# Altium PCB 20250717-Copy of PowerUpDelay-SCR.PcbDoc
Units mm, origin at the board's own origin, x right, y up, seen from the top; angles counter-clockwise.
Board outline 52 x 90 mm, 2 copper layers (Top Layer, Bottom Layer), stack 1.569 mm thick; 57 components, 36 nets, 143 pads, 166 vias.
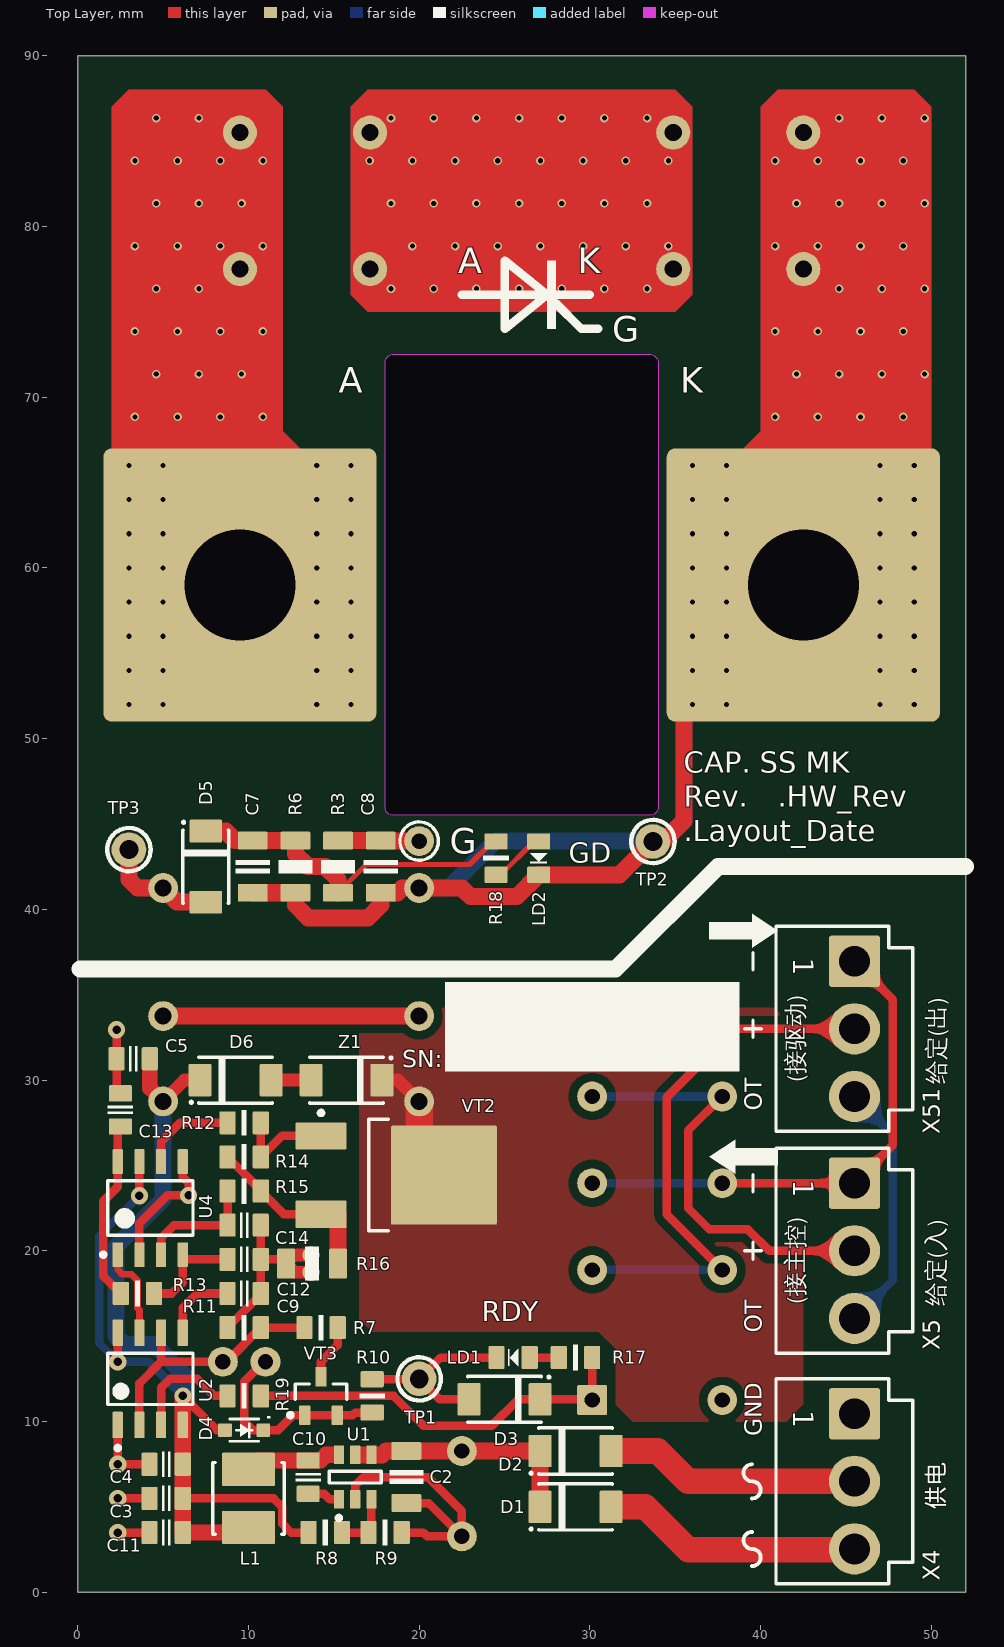
[diagram p0: Top Layer view]
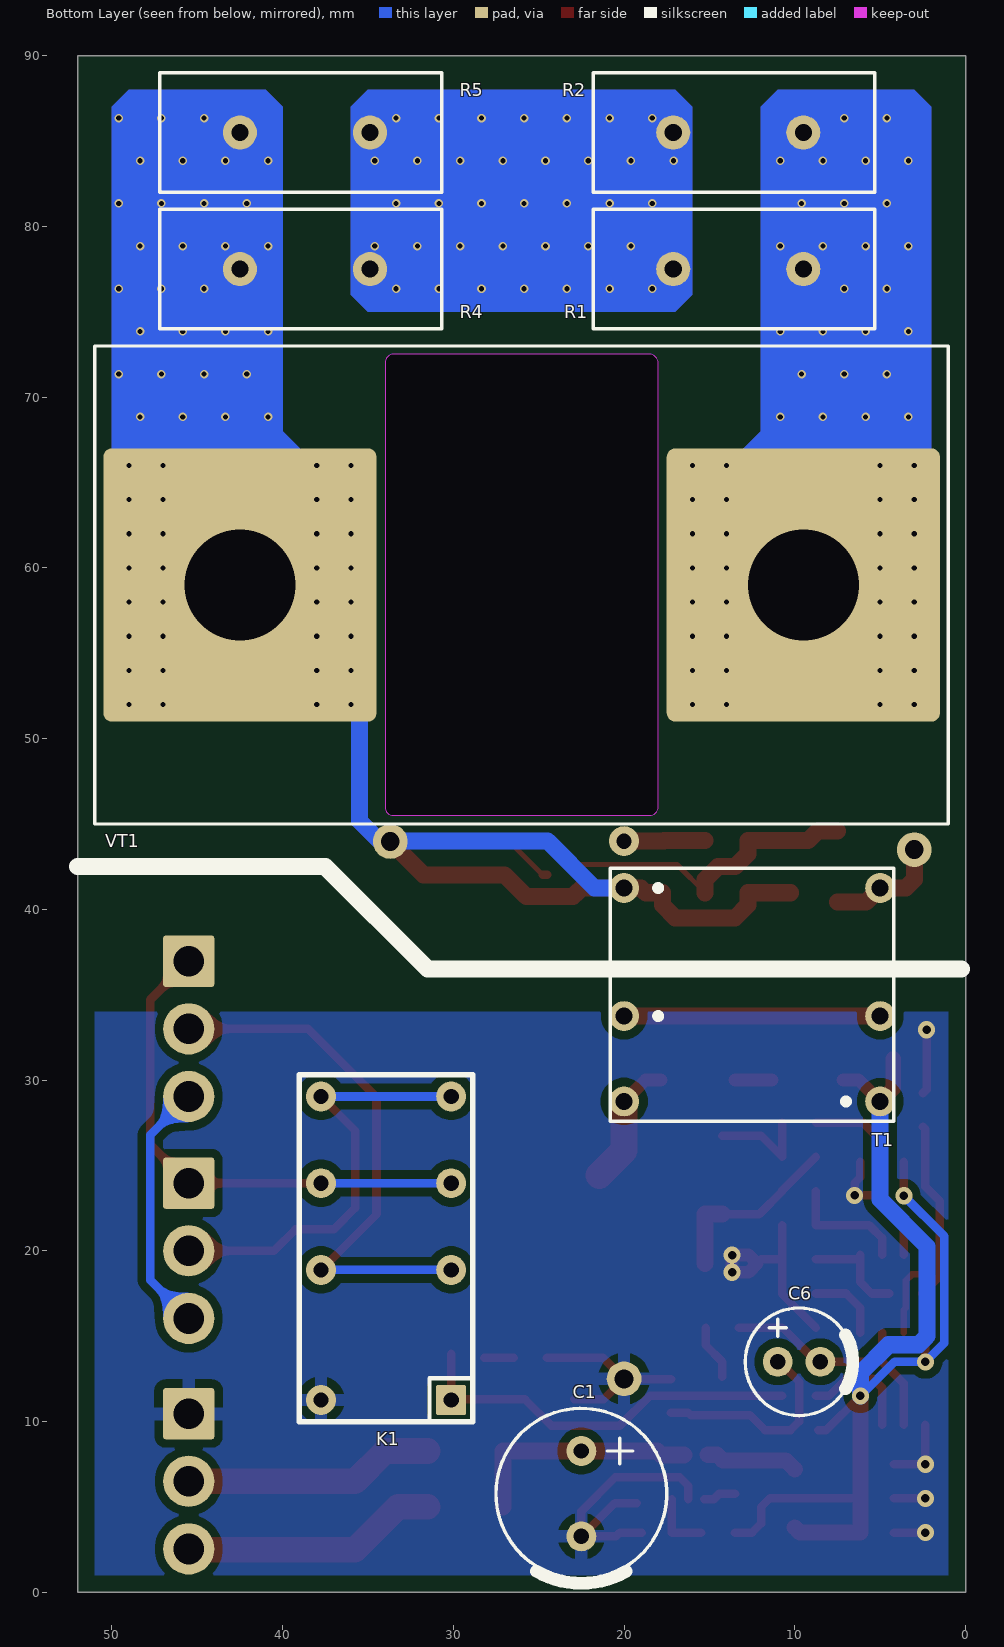
[diagram p1: Bottom Layer view, seen from below]

## Layer stack, top to bottom
Top Solder: solder mask 0.0254, SM-001, Dk 4
Top Layer: signal copper 0.035
Dielectric 1: core 1.4986, Core-043, Dk 4.3
Bottom Layer: signal copper 0.035
Bottom Solder: solder mask 0.0254, SM-001, Dk 4

## Board outline
0,0 0,90 52,90 52,0
cut-out: 18.5,45.5 18.401,45.5 18.217,45.576 18.076,45.717 18,45.901 18,46 18,72 18,72.099 18.076,72.283 18.217,72.424 18.401,72.5 18.5,72.5 33.5,72.5 33.599,72.5 33.783,72.424 33.924,72.283 34,72.099 34,72 34,46 34,45.901 33.924,45.717 33.783,45.576 33.599,45.5 33.5,45.5

## Design rules (kind name [scope] priority, off if disabled: settings)
BoardOutlineClearance [All] p1: gap=1 ignorepadtopadclearanceinfootprint=FALSE except(0: Arc-SplitContinuation Track-SplitContinuation SMDPad-SplitContinuation THPad-SplitContinuation Via-SplitContinuation Fill-SplitContinuation Poly-SplitContinuation Region-SplitContinuation Text-SplitContinuation)
Clearance Clearance_1 [InPolygon] p1: gap=0.5 ignorepadtopadclearanceinfootprint=FALSE
Clearance [All] p2: gap=0.25 ignorepadtopadclearanceinfootprint=FALSE
ComponentClearance [All] p1 off: gap=0.254 collisioncheckmode=3 verticalgap=0.25 showdistances=FALSE
PolygonConnect PolygonConnect_1 [IsNamedPolygon('NetT1_3_L-01_P-001')] p1: connectstyle=Direct reliefconductorwidth=0.254 reliefentries=4 polygonreliefangle="90 Angle" airgapwidth=0.254
PolygonConnect [All] p2: thpad.connectstyle=Relief thpad.reliefconductorwidth=0.75 thpad.reliefentries=4 thpad.polygonreliefangle="90 Angle" thpad.airgapwidth=0.5 smdpad.connectstyle=NoConnect smdpad.reliefconductorwidth=0.254 smdpad.reliefentries=4 smdpad.polygonreliefangle="90 Angle" smdpad.airgapwidth=0.254 via.connectstyle=Direct via.reliefconductorwidth=0.254 via.reliefentries=4 via.polygonreliefangle="90 Angle" via.airgapwidth=0.254
RoutingVias [All] p1: holewidth=0.4 width=0.75 viastyle="Through Hole" minholewidth=0.3 minwidth=0.5 maxholewidth=1 maxwidth=2
SolderMaskExpansion [All] p1: expansion=0.102 istentingtop=FALSE
SupplyNets "Schematic Supply Nets_3" [InNet('GND')] p1: voltage=0.000
SupplyNets "Schematic Supply Nets_2" [InNet('GND-S')] p2: voltage=0.000
SupplyNets "Schematic Supply Nets_1" [InNet('Vc')] p3: voltage=0.000
SupplyNets "Schematic Supply Nets" [InNet('+12')] p4: voltage=0.000
Width [All] p1: maxlimit=2.5 minlimit=0.25 preferedwidth=0.25
29 further rules are at their usual default settings.

## Components (designator, comment, footprint, x,y, rotation, side; value= is the part's Value field where it differs from the comment)
C1 "470uF/35V" RB5M/D10 22.5,5.775 r270 bottom
C2 "2u2" CAPC1206N 19.25,6.75 r270 top
C3 "10uF" CAPC0805N 5.18,5.5 r180 top
C4 "100n" CAPC0805N 5.18,7.5 r0 top
C5 "1u" CAPC0805N 3.25,31.25 r180 top
C6 "47uF/50V" RB2.5M/D6.3 9.75,13.5 r180 bottom
C7 "10u" CAPC1206N 10.25,42.5 r270 top
C8 "100n" CAPC1206N 17.75,42.5 r270 top
C9 "10n" CAPC0805N 9.75,17.5 r0 top
C10 "100nF" CAPC0805N 13.5,6.75 r90 top
C11 "10uF" CAPC0805N 5.18,3.5 r180 top
C12 "1n" CAPC0805N 9.75,19.5 r180 top
C13 "1u" CAPC0805N 2.5,28.25 r90 top
C14 "100p" CAPC0805N 9.75,21.5 r0 top
D1 "M4F" SMAF 29.16,5 r0 top
D2 "M4F" SMAF 29.16,8.275 r0 top
D3 "M4F" SMAF 25,11.3 r180 top
D4 "1N4148WS" SOD-323F-1K2A 9.75,9.5 r0 top
D5 "US1MF" SMAF 7.5,42.5 r270 top
D6 "US1MF" SMAF 9.25,30 r0 top
K1 "HFD27-12M" RLY-DPDT 37.75,11.26 r180 bottom
L1 "10uH" INDP4040X20N 10,5.5 r270 top
LD1 "GRN/0805" LEDC0805N 25.5,13.75 r180 top
LD2 "GRN/0805" LEDC0805N 27,43 r270 top
R1 "XK-D17-100R" PTC-X17 13.31,77.5 r180 bottom
R2 "XK-D17-100R" PTC-X17 13.31,85.5 r180 bottom
R3 "10R" RESC1206N 15.25,42.5 r90 top
R4 "XK-D17-100R" PTC-X17 38.69,77.5 r180 bottom
R5 "XK-D17-100R" PTC-X17 38.69,85.5 r180 bottom
R6 "1K" RESC1206N 12.75,42.5 r270 top
R7 "100R" RESC0805N 14.25,15.5 r180 top
R8 "243K" RESC0805N 14.5,3.5 r180 top
R9 "22K1" RESC0805N 18,3.5 r180 top
R10 "5K1" RESC0805N 17.25,11.5 r270 top
R11 "100K" RESC0805N 9.75,15.5 r180 top
R12 "30R" RESC0805N 9.75,27.5 r180 top
R13 "8K2" RESC0805N 3.5,17.5 r0 top
R14 "10K" RESC0805N 9.75,25.5 r180 top
R15 "1K" RESC0805N 9.75,23.5 r0 top
R16 "1R" RESC1206N 13.725,19.25 r180 top
R17 "10K" RESC0805N 29.155,13.75 r180 top
R18 "5K1" RESC0805N 24.5,43 r270 top
R19 "10R" RESC0805N 9.75,11.5 r180 top
T1 "DRT801-111" TRANS-DRT801-1+1+1 12.5,35 r270 bottom locked
TP1 "TESTPOINT" TESTPOINT 20,12.5 r0 top
TP2 "TESTPOINT" TESTPOINT 33.691,43.975 r0 top
TP3 "TESTPOINT" TESTPOINT 3,43.5 r0 top
U1 "LMR50410YQDBVRQ1" FP-DBV0006A-MFG 16.25,6.75 r90 top
U2 "NE555DR" FP-D0008A-MFG 4.25,12.5 r90 top
U4 "UC2845AD8TR" D0008A_N 4.25,22.5 r90 top
VT1 "MT200A-16.71" MT200A-16.71 26,59 r0 bottom
VT2 "IRFR024N" ONSC-DPAK-3-369AA-01_V 18.65,24.435 r0 top
VT3 "BC807-40" SOT-23_N 14.25,11.5 r90 top
X4 "JST-B3P-VH" B3P-VH 45.5,6.5 r270 top
X5 "JST-B3P-VH" B3P-VH 45.5,20 r270 top
X51 "JST-B3P-VH" B3P-VH 45.5,33 r270 top
Z1 "1SMAF4742A" SMAF 15.75,30 r180 top

## Footprints (in the part's own frame and the unit in brackets; to place one, negate y for a bottom-side part, rotate by r counter-clockwise, add the part's x,y. Pads: shape width x height; smd on the part's side, far side on the other; paste and mask are expansions set on the pad)
B3P-VH [mm] "JST-B3P-V, 3.96mm间距接插件"
  rrect10% 3x3 hole 1.8: 1(-3.96,0)
  round 3 hole 1.8: 2(0,0) 3(3.96,0)
  silkscreen extent -6,-4.6 6,3.4, body extent -5.91,-4.85 5.91,3.65, height 11
CAPC0805N [mm] "Chip Capacitor, 2-Leads, Body 2.00x1.25mm, IPC Medium Density"
  rrect15% 0.95x1.35 smd: 1(-0.975,0) 2(0.975,0)
  silkscreen extent -0.25,-0.75 0.25,0.75, body extent -1,-0.62 1,0.63, height 0.78
CAPC1206N [mm] "Chip Capacitor, 2-Leads, Body 3.20x1.65mm, IPC Medium Density"
  rrect15% 1.05x1.75 smd: 1(-1.525,0) 2(1.525,0)
  silkscreen extent -0.4,-1 0.4,1, body extent -1.6,-0.8 1.6,0.8, height 1
D0008A_N [mm] "SOIC, 8-Leads, Body 5x4mm, Pitch 1.27mm, IPC Medium Density"
  rrect17% 1.45x0.6 smd: 1(-2.725,1.905) 2(-2.725,0.635) 3(-2.725,-0.635) 4(-2.725,-1.905) 5(2.725,-1.905) 6(2.725,-0.635) 7(2.725,0.635) 8(2.725,1.905)
  silkscreen extent -2.85,-2.5 1.6,2.88, body extent -3,-2.45 3,2.45, height 1.63
FP-D0008A-MFG [mm]
  rrect17% 1.55x0.6 smd paste+0 mask+0: 1(-2.7,1.905) 2(-2.7,0.635) 3(-2.7,-0.635) 4(-2.7,-1.905) 5(2.7,-1.905) 6(2.7,-0.635) 7(2.7,0.635) 8(2.7,1.905)
  silkscreen extent -4.17,-2.5 1.5,2.5, body extent -3.57,-2.75 3.57,2.75, height 0.25
FP-DBV0006A-MFG [mm]
  rrect17% 1.1x0.6 smd paste+0 mask+0: 1(-1.3,0.95) 2(-1.3,0) 3(-1.3,-0.95) 4(1.3,-0.95) 5(1.3,0) 6(1.3,0.95)
  silkscreen extent -2.52,-1.53 0.35,1.53, body extent -1.95,-1.78 1.95,1.78, height 0.25
INDP4040X20N [mm] "Precision Wire Wound Inductor, 2-Leads, Body 4.00x4.00mm, IPC Medium Density"
  rrect7% 1.95x3.1 smd: 1(-1.7,0) 2(1.7,0)
  silkscreen extent -2.1,-2.1 2.1,2.1, body extent -2.1,-2.1 2.1,2.1, height 2
LEDC0805N [mm]
  rrect15% 0.95x1.35 smd: 1(-0.975,0) 2(0.975,0)
  silkscreen extent -0.3,-0.5 0.3,0.5, body extent -1.05,-0.67 1.05,0.68, height 0.9
MT200A-16.71 [mm] "拓直可控硅模块，200A，1600V,"
  rrect6% 16x16 hole 6.5: 1(-16.5,0) 2(16.5,0)
  round 1.75 hole 0.9: 3(-6,15)
  silkscreen extent -25,-14 25,14
ONSC-DPAK-3-369AA-01_V [mm] "DPAK, 3-Leads, Body 6.54x6.095mm, Pitch 2.29mm"
  rrect10% 3x1.6 smd: 1(-4.4,2.29) 3(-4.4,-2.29)
  rrect3% 6.2x5.8 smd: 4(2.8,0)
  silkscreen extent -4.52,-3.27 -0.45,3.76, body extent -4.82,-3.29 4.88,3.29, height 2.35
PTC-X17 [mm] "PTC, Thru-Hole, Dipped Radial; Body D17 x 7 mm (WxT) Pin Spacing 7.62 mm (typ)"
  round 2 hole 1: 1(-3.81,0) 2(3.81,0)
  silkscreen extent -8.5,-3.5 8,3.5
RB2.5M/D6.3 [mm]
  round 1.75 hole 0.9: 1(-1.25,0) 2(1.25,0)
  silkscreen extent -3.15,-3.15 3.15,3.15, body extent -3.15,-3.15 3.15,3.14, height 6.3
RB5M/D10 [mm]
  round 1.75 hole 0.9: 1(-2.5,0) 2(2.5,0)
  silkscreen extent -5,-5 5.25,5, body extent -5,-5 5,5, height 10
RESC0805N [mm] "Chip Resistor, 2-Leads, Body 2.00x1.25mm, IPC Medium Density"
  rrect15% 0.95x1.35 smd: 1(-0.975,0) 2(0.975,0)
  silkscreen extent -0.15,-0.75 0.15,0.75, body extent -1,-0.63 1,0.62, height 0.6
RESC1206N [mm] "Chip Resistor, 2-Leads, Body 3.20x1.65mm, IPC Medium Density"
  rrect15% 1.05x1.75 smd: 1(-1.525,0) 2(1.525,0)
  silkscreen extent -0.4,-1 0.4,1, body extent -1.6,-0.8 1.6,0.8, height 0.6
RLY-DPDT [mm]
  round 1.75 hole 0.9: COL1(0,0) COM1(0,7.62) COM2(7.62,7.62) NC1(0,12.7) NC2(7.62,12.7) NO1(0,17.78) NO2(7.62,17.78)
  rrect10% 1.75x1.75 hole 0.9: COL2(7.62,0)
  silkscreen extent -1.27,-1.27 8.89,19.05
SMAF [mm] "Flat SMA Package"
  rrect10% 1.34x1.9 smd paste+0 mask+0: 1(-2.08,0) 2(2.08,0)
  silkscreen extent -2.65,-1.35 2.15,1.35, body extent -2.85,-1.45 2.85,1.45, height 0.25
SOD-323F-1K2A [mm] "SOD-323F/SC-90; 2 Leads; Body 1.7 x 1.3 mm, (LxW)"
  rrect15% 0.8x0.8 smd: 1(1.125,0) 2(-1.125,0)
  silkscreen extent -0.85,-0.65 1.55,0.83, body extent -1.25,-0.63 1.25,0.63, height 0.78
SOT-23_N [mm] "SOT23, 3-Leads, Body 2.9x1.3mm, Pitch 0.95mm, Lead Span 2.5mm, IPC Medium Density"
  rrect15% 1.15x0.65 smd: 1(-1.125,0.95) 2(-1.125,-0.95) 3(1.125,0)
  silkscreen extent -1.25,-1.5 0.7,1.92, body extent -1.4,-1.45 1.4,1.45, height 1.3
TESTPOINT [mil]
  round 80 hole 43.31: 1(0,0)
  silkscreen extent -50,-50 50,50
TRANS-DRT801-1+1+1 [mm] "IGBT驱动变压器 DRT801/111B, 兵字"
  round 1.75 hole 1: 1(-6.25,-7.5) 2(1.25,-7.5) 3(6.25,-7.5) 4(6.25,7.5) 5(1.25,7.5) 6(-6.25,7.5)
  silkscreen extent -7.4,-8.3 7.4,8.3, body extent -7.4,-8.3 7.4,8.3, height 13.5

## Part data
C1 C6: library part "CAPACITOR POL(S)"
C2 C3 C4 C5 C7 C8 C9 C10 C11 C12 C13 C14: library part CAPACITOR(S)
D1 D2 D3 D4 D5 D6: library part DIODE(S), "二极管"
K1: library part RELAY-DPDT, "继电器"
L1: library part IND
LD1 LD2: library part LED(S)
R1 R2 R4 R5: library part "RESISTOR(S) NL", "None Liner Resistor"
R3 R6 R11 R12 R13 R14 R15 R16 R17 R18 R19: library part RESISTOR(S)
R7 R8 R9 R10: library part RESISTOR(S), "电阻"
T1: library part TRANSFORM-DRT801-111_FB, "IGBT驱动变压器, DRT801/111, 12.5x16.6mm"
TP1 TP2 TP3: "测试点"
U1: library part CMP-04918-000478-1, "NIXON PLUS-LMR50410YQDBVRQ1"
U2: library part CMP-1685-00007-2, "IC OSC SGL TIMER 100KHZ 8-SOIC"
U4: library part CMP-0319-00631-2, "PWM Controller with Current Control, 50 % Duty Cycle, -40 to +85 degC, 8-pin SOIC (D), Green (RoHS & no Sb/Br)"
VT1: library part SCR(S), "晶闸管"
VT2: library part "MOSFET - N-CH", "MOSFET N-CH D-PAK/TO252"
VT3: library part PNP, "PNP Bipolar Transistor"
X4 X5 X51: library part 3PIN-PCB-Connector, "线路板接插件"
Z1: library part "DIODE ZENER(S)", "齐纳二极管"

## Via types
v1: diameter 0.5, hole 0.3, Top Layer to Bottom Layer, tented both sides, 156 vias
v2: diameter 1, hole 0.5, Top Layer to Bottom Layer, tented both sides, 10 vias

## Nets (pads, with @x,y where several pads share a name; then routed paths per layer and width w, separated by ;. In a path a pad name is that pad's centre, name@x,y a point inside that pad or via, vN(x,y) a via of type N, cw(c..) or ccw(c..) an arc to the next point about the centre after c; other vN are vias at no path point)
+12: C3.1 C4.2 C5.1 C11.1 D4.2 D6.1 L1.2 R8.2 T1.4 U2.4 U2.8 U4.7 | length 70.1
  Top Layer w0.5: v2(2.345,13.5) U2.8 ; v2(3.615,23.225) U4.7 ; C3.1 11.475,5.5 11.975,5 11.975,4.025 12.5,3.5 R8.2 ; v2(6.155,11.5) 8.155,9.5 D4.2
  Top Layer w0.75: T1.4 6.25,30 D6.1
  Top Layer w0.9: C5.1 4.225,29.525 T1.4
  Top Layer w0.95: v2(6.155,11.5) U2.4 C4.2 C3.1 C11.1 9.7,3.5 L1.2
  Bottom Layer w0.5: v2(3.615,23.225) 1.25,20.86 1.25,14.595 v2(2.345,13.5) 4.155,13.5 v2(6.155,11.5)
  Bottom Layer w1: T1.4 5,23 2.25,20.25 2.25,15 2.75,14.5 4.5,14.5 6.155,12.845 v2(6.155,11.5)
GND: C1.2 C2.2 C3.2 C4.1 C5.2 C9.2 C11.2 C12.1 C13.2 C14.2 D3.2 K1.COL1 LD1.2 R9.1 R10.1 R11.2 R16.2 TP1.1 U1.2 U2.1 U4.2 U4.5 X4.1 | length 60.5
  Top Layer w0.5: v2(2.275,32.95) C5.2 2.275,29.45 C13.2 ; v2(2.345,3.5) C11.2 ; v2(2.345,5.5) C3.2 ; U2.1 v2(2.345,7.5) C4.1 ; U4.2 3.615,21.615 5.25,23.25 v2(6.5,23.25) ; U4.5 6.155,24.318 6.5,23.973 v2(6.5,23.25) ; v2@6.525,23.225 v2(6.5,23.25) ; R11.2 10.725,17.45 C9.2 C12.1 ; C14.2 C12.1 ; R16.2 11.95,19.5 C12.1 ; U1.2 16.25,6.25 16.75,6.75 20.5,6.75 22.5,4.75 C1.2 ; R10.1 19.975,12.475 TP1.1 ; R9.1 20.25,3.5 20.475,3.275 C1.2 ; C2.2 20.55,5.225 C1.2 ; D3.2 21.2,11.3 TP1.1 ; LD1.2 21.25,13.75 TP1.1
  Top Layer w0.75: v2@13.669,18.75 12.7,18.75 R16.2 12.7,19.75 v2@13.669,19.75 ; v2(13.675,18.744) v2(13.675,19.744)
  Top Layer w1: X4.1@45.46,10.5 X4.1
GND-S: K1.NC1 K1.NC2 X5.1 X51.1 | length 30.3
  Top Layer w0.5: K1.NC1 X5.1 47.75,26.21 47.75,34.71 X51.1
  Bottom Layer w0.5: K1.NC2 37.71,23.96 K1.NC1@37.75,24
Iref: K1.NO1 K1.NO2 X5.2 | length 25.8
  Top Layer w0.5: K1.NO1 35.75,27.04 35.75,22.5 37,21.25 39.25,21.25 40.5,20 X5.2
  Bottom Layer w0.5: K1.NO2 K1.NO1
Iref-s: K1.COM1 K1.COM2 X51.2 | length 31.7
  Top Layer w0.5: K1.COM1 34.5,22.13 34.5,29 38.5,33 X51.2
  Bottom Layer w0.5: K1.COM2 K1.COM1
NetC1_1: C1.1 C2.1 D1.1 D2.1 U1.4 U1.5 | length 13.9
  Top Layer w1: U1.5@16.5,8.05 U1.4 17.83,8.05 18.055,8.275 C2.1 C1.1 D2.1 D1.1
NetC6_1: C6.1 D4.1 R10.2 VT3.1 VT3.2 | length 12.2
  Top Layer w0.5: C6.1 10.91,13.5 9.75,12.34 9.75,12.25 9.75,10 10.25,9.5 D4.1 11.75,9.5 12.625,10.375 VT3.1 VT3.2 16.1,10.375 16.25,10.525 R10.2
NetC6_2: C6.2 R7.2 R11.1 U2.2 U2.6 | length 15.1
  Top Layer w0.5: U2.2 3.615,12.23 4.885,13.5 ; U2.6 4.885,13.5 ; R7.2 R11.1 8.725,13.5 C6.2 4.885,13.5
NetC7_1: C7.1 D5.1 R3.1 R6.1 R18.1 | length 20.6
  Top Layer w0.3: R3.1 16.9,42.625 22.955,42.625 24.305,43.975 R18.1
  Top Layer w1: D5.1 8.67,44.58 9.225,44.025 C7.1 R6.1 12.75,43.25 13.5,42.5 14.5,42.5 15.25,41.75 R3.1
NetC7_2: C7.2 C8.2 LD2.2 R4.1 R5.1 R6.2 T1.1 TP2.1 VT1.2 | length 85.9
  Top Layer w0.3: 21.725,41.25 22,40.975 22.775,40.975 25.741,40.975 26.791,42.025 LD2.2
  Top Layer w1: C7.2 R6.2 12.75,40.25 13.5,39.5 17,39.5 17.75,40.25 C8.2 18.725,40.975 19,41.25 T1.1 21.725,41.25 22.5,41.25 22.775,40.975 23,40.75 25.725,40.75 LD2.2 31.741,42.025 TP2.1 33.975,43.975 34,44 34.121,44 34.328,44 35.5,45.172 35.5,52 VT1.2
  Bottom Layer w1: T1.1 21.725,41.25 24.475,44 34.121,44 34.328,44 35.5,45.172 35.5,45.379 35.5,52 VT1.2
  other v1: 36,52 38,52 47,52 49,52 36,54 38,54 47,54 49,54 36,56 38,56 47,56 49,56 36,58 38,58 47,58 49,58 36,60 38,60 47,60 49,60 36,62 38,62 47,62 49,62 36,64 38,64 47,64 49,64 36,66 38,66 47,66 49,66 40.85,68.85 43.35,68.85 45.85,68.85 48.35,68.85 42.1,71.35 44.6,71.35 47.1,71.35 49.6,71.35 40.85,73.85 43.35,73.85 45.85,73.85 48.35,73.85 44.6,76.35 47.1,76.35 49.6,76.35 40.85,78.85 43.35,78.85 45.85,78.85 48.35,78.85 42.1,81.35 44.6,81.35 47.1,81.35 49.6,81.35 40.85,83.85 43.35,83.85 45.85,83.85 48.35,83.85 44.6,86.35 47.1,86.35 49.6,86.35
NetC8_1: C8.1 R3.2 VT1.3 | length 4.8
  Top Layer w1: R3.2 17.647,44.025 17.672,44 VT1.3
NetC9_1: C9.1 U2.5 | length 4.4
  Top Layer w0.5: U2.5 6.155,16.655 7,17.5 C9.1
NetC10_1: C10.1 U1.1 | length 1.9
  Top Layer w0.5: C10.1 14.425,5.775 14.75,5.45 U1.1
NetC10_2: C10.2 L1.1 U1.6 | length 5.5
  Top Layer w0.95: L1.1 10.525,7.725 C10.2 14.225,7.725 14.55,8.05 U1.6@15.1,8.05
NetC12_2: C12.2 R13.2 U4.4 | length 6.2
  Top Layer w0.5: R13.2 5.5,17.5 6.155,18.155 U4.4@6.155,19.5 ; U4.4 U4.4@6.155,19.5 ; C12.2 U4.4@6.155,19.5
NetC13_1: C13.1 R13.1 U4.8 | length 10.6
  Top Layer w0.5: C13.1 2.345,27.12 U4.8 2.345,23.75 1.5,22.905 1.5,18.525 R13.1
NetC14_1: C14.1 R15.1 U4.3 | length 7.2
  Top Layer w0.5: U4.3 4.885,20.75 5.635,21.5 C14.1 R15.1
NetD1_2: D1.2 X4.3 | length 15.1
  Top Layer w1: X4.3@45.46,2.5 X4.3
  Top Layer w1.5: D1.2@31.5,5 33.25,5 35.75,2.5 X4.3@45.46,2.5
NetD2_2: D2.2 X4.2 | length 14.7
  Top Layer w1.5: D2.2@31.5,8.275 33.975,8.275 35.75,6.5 X4.2
NetD3_1: D3.1 K1.COL2 R17.1 R19.1 | length 23.4
  Top Layer w0.5: R19.1 18.5,11.5 20.25,9.75 24.25,9.75 25.8,11.3 D3.1 30.13,11.3 R17.1 R17.1@30.13,13.967
NetD5_2: D5.2 T1.6 TP3.1 | length 6.8
  Top Layer w1: TP3.1 3,41.75 3.5,41.25 T1.6 5.83,40.42 D5.2
NetD6_2: D6.2 Z1.2 | length 2.2
  Top Layer w0.75: D6.2 Z1.2@13.5,30
NetLD1_1: LD1.1 R17.2 | length 1.7
  Top Layer w0.5: LD1.1 R17.2
NetLD2_1: LD2.1 R18.2 | length 3.3
  Top Layer w0.3: R18.2@24.775,42.025 LD2.1@26.725,43.975
  Top Layer w0.5: R18.2 R18.2@24.775,42.025 ; LD2.1@26.725,43.975 LD2.1
NetR1_1: R1.1 R2.1 R4.2 R5.2
  other v1: 18.35,76.35 20.85,76.35 23.35,76.35 25.85,76.35 28.35,76.35 30.85,76.35 33.35,76.35 19.6,78.85 22.1,78.85 24.6,78.85 27.1,78.85 29.6,78.85 32.1,78.85 34.6,78.85 18.35,81.35 20.85,81.35 23.35,81.35 25.85,81.35 28.35,81.35 30.85,81.35 33.35,81.35 17.1,83.85 19.6,83.85 22.1,83.85 24.6,83.85 27.1,83.85 29.6,83.85 32.1,83.85 34.6,83.85 18.35,86.35 20.85,86.35 23.35,86.35 25.85,86.35 28.35,86.35 30.85,86.35 33.35,86.35
NetR1_2: R1.2 R2.2 VT1.1
  other v1: 3,52 5,52 14,52 16,52 3,54 5,54 14,54 16,54 3,56 5,56 14,56 16,56 3,58 5,58 14,58 16,58 3,60 5,60 14,60 16,60 3,62 5,62 14,62 16,62 3,64 5,64 14,64 16,64 3,66 5,66 14,66 16,66 3.35,68.85 5.85,68.85 8.35,68.85 10.85,68.85 4.6,71.35 7.1,71.35 9.6,71.35 3.35,73.85 5.85,73.85 8.35,73.85 10.85,73.85 4.6,76.35 7.1,76.35 3.35,78.85 5.85,78.85 8.35,78.85 10.85,78.85 4.6,81.35 7.1,81.35 9.6,81.35 3.35,83.85 5.85,83.85 8.35,83.85 10.85,83.85 4.6,86.35 7.1,86.35
NetR7_1: R7.1 VT3.3 | length 3.3
  Top Layer w0.5: VT3.3 14.25,13.5 15.225,14.475 R7.1
NetR8_1: R8.1 R9.2 U1.3 | length 3.7
  Top Layer w0.5: R8.1 R9.2 17.2,3.5 U1.3
NetR12_1: R12.1 R14.1 VT2.1 | length 6
  Top Layer w0.5: R12.1 R14.1 11.975,26.75 VT2.1@14.25,26.75
NetR12_2: R12.2 U4.6 | length 5.5
  Top Layer w0.5: U4.6 4.885,26.385 6,27.5 R12.2@8.75,27.5
NetR14_2: R14.2 R15.2 R16.1 VT2.3 | length 10.8
  Top Layer w0.5: R14.2 10.725,23.55 R15.2 12.08,22.145 VT2.3
  Top Layer w1: VT2.3 15.25,22.145 R16.1
NetR19_2: R19.2 U2.3 | length 6.7
  Top Layer w0.5: U2.3 4.885,11.975 5.41,12.5 7,12.5 8,11.5 R19.2
NetT1_2: T1.2 T1.5 | length 15
  Top Layer w1: T1.5 T1.2
NetT1_3: T1.3 VT2.4 Z1.1 | length 7.6
  Top Layer w0.75: Z1.1 18.75,30 T1.3
  Top Layer w1.6: T1.3 20,25.885 VT2.4
NetU2_7: U2.7 U4.1 | length 5.4
  Top Layer w0.4: U4.1 2.345,18.905 2.625,18.625 3.145,18.625 3.5,18.27 3.5,16.655 3.615,16.54 U2.7
Vc: X5.3 X51.3 | length 14.9
  Bottom Layer w0.5: X5.3 47.75,18.29 47.75,26.79 X51.3

## Polygon pours and split planes (outlines as drawn)
GND on Bottom Layer "NONET_L-01_P-001" (solid, remove dead copper, pour order 0): 0,34 52,34 52,0 0,0
NetT1_3 on Top Layer "NetT1_3_L-01_P-001" (solid, remove dead copper, pour order 1): 16.5,34.25 16.5,16 17.25,15.25 30.5,15.25 31.5,14.25 31.5,11 32.5,10 41.5,10 42.5,11 42.5,32.5 40.75,34.25

## Other copper
Top Layer:
  region net NetR1_1: 17,88 16,87 16,76 17,75 35,75 36,76 36,87 35,88
  region net NetR1_2: 2,66.5 2,87 3,88 11,88 12,87 12,68 13.5,66.5
  region net NetC7_2: 50,66.5 50,87 49,88 41,88 40,87 40,68 38.5,66.5
Bottom Layer:
  region net NetR1_1: 17,88 16,87 16,76 17,75 35,75 36,76 36,87 35,88
  region net NetR1_2: 2,66.5 2,87 3,88 11,88 12,87 12,68 13.5,66.5
  region net NetC7_2: 50,66.5 50,87 49,88 41,88 40,87 40,68 38.5,66.5

## Silkscreen, mask and mechanical layers (free items; w line width, h text height)
Top Overlay:
  circle w0.2: c20,44 r1.125
  rectangle: 27.5,74 28,78
  region: 38.75,35.75 21.5,35.75 21.5,30.5 38.75,30.5
  region: 37,25.5 38.5,24.5 38.5,25 41,25 41,26 38.5,26 38.5,26.5
  region: 41,38.75 39.5,39.75 39.5,39.25 37,39.25 37,38.25 39.5,38.25 39.5,37.75
  lines w0.2: 39.053,20 40.053,20 ; 39.053,33 40.053,33 ; 39.553,19.5 39.553,20.5 ; 39.553,23.46 39.553,24.46 ; 39.553,32.5 39.553,33.5 ; 39.553,36.46 39.553,37.46
  lines w0.225: 39.5,1.54 ccw(c39.5,2.04) 39.5,2.54 cw(c39.5,3.04) 39.5,3.54 ; 39.5,5.5 ccw(c39.5,6) 39.5,6.5 cw(c39.5,7) 39.5,7.5
  lines w0.5: 22.5,76 30,76 ; 28,75.5 29.5,74 30.5,74 ; 25,74 27.5,76 25,78 25,76 25,74
  lines w1: 0.15,36.5 31.5,36.5 37.5,42.5 52,42.5
  text "A" at 22.3,77.25 h1.5
  text "K" at 29.3,77.25 h1.5
  text "G" at 31.3,73.25 h1.5
  text "A" at 15.3,70.25 h1.5
  text "K" at 35.3,70.25 h1.5
  text "CAP. SS MK" at 35.5,48 h1.25
  text "Rev." at 35.5,46 h1.25
  text ".HW_Rev" at 41,46 h1.25
  text ".Layout_Date" at 35.5,44 h1.25
  text "G" at 21.8,43.25 h1.5
  text "GD" at 28.75,42.359 h2
  text "SN:" at 19,30.75 h1
  text "(接驱动)" at 42.87,29.908 h1.75 r90
  text "给定(出)" at 51.129,29.744 h1.75 r90
  text "OT" at 40.053,28.207 h1 r90
  text "(接主控)" at 42.87,16.908 h1.75 r90
  text "给定(入)" at 51.116,16.744 h1.75 r90
  text "RDY" at 23.676,15.5 h2
  text "OT" at 40.053,15.207 h1 r90
  text "GND" at 40.053,9.127 h1 r90
  text "供电" at 51.1,4.82 h1.75 r90
Bottom Overlay:
  lines w1: 0.25,36.5 31.5,36.5 37.5,42.5 52,42.5
Board:
  the board outline again, w0.1

## Dimensions
0,0 to 0,90 on Dimensions
0,0 to 52,0 on Dimensions

## Text inside footprints (layer, text, board x,y; h text height)
VT1: Bottom Assembly "A" at 14.5,69.604 h1.5; Bottom Assembly "K" at 36.5,69.604 h1.5; Bottom Assembly "G" at 16.5,43.604 h1.5
X4: Top Overlay "1" at 41.9,10.66 h1.2 r270
X5: Top Overlay "1" at 41.9,24.16 h1.2 r270
X51: Top Overlay "1" at 41.9,37.16 h1.2 r270